# Altium PCB beta0303initial.PcbDoc (part 1 of 2)
Units mm, origin at the board's own origin, x right, y up, seen from the top; angles counter-clockwise.
Board outline 100 x 100 mm, 2 copper layers (Top Layer, Bottom Layer); 188 components, 107 nets, 516 pads, 164 vias.
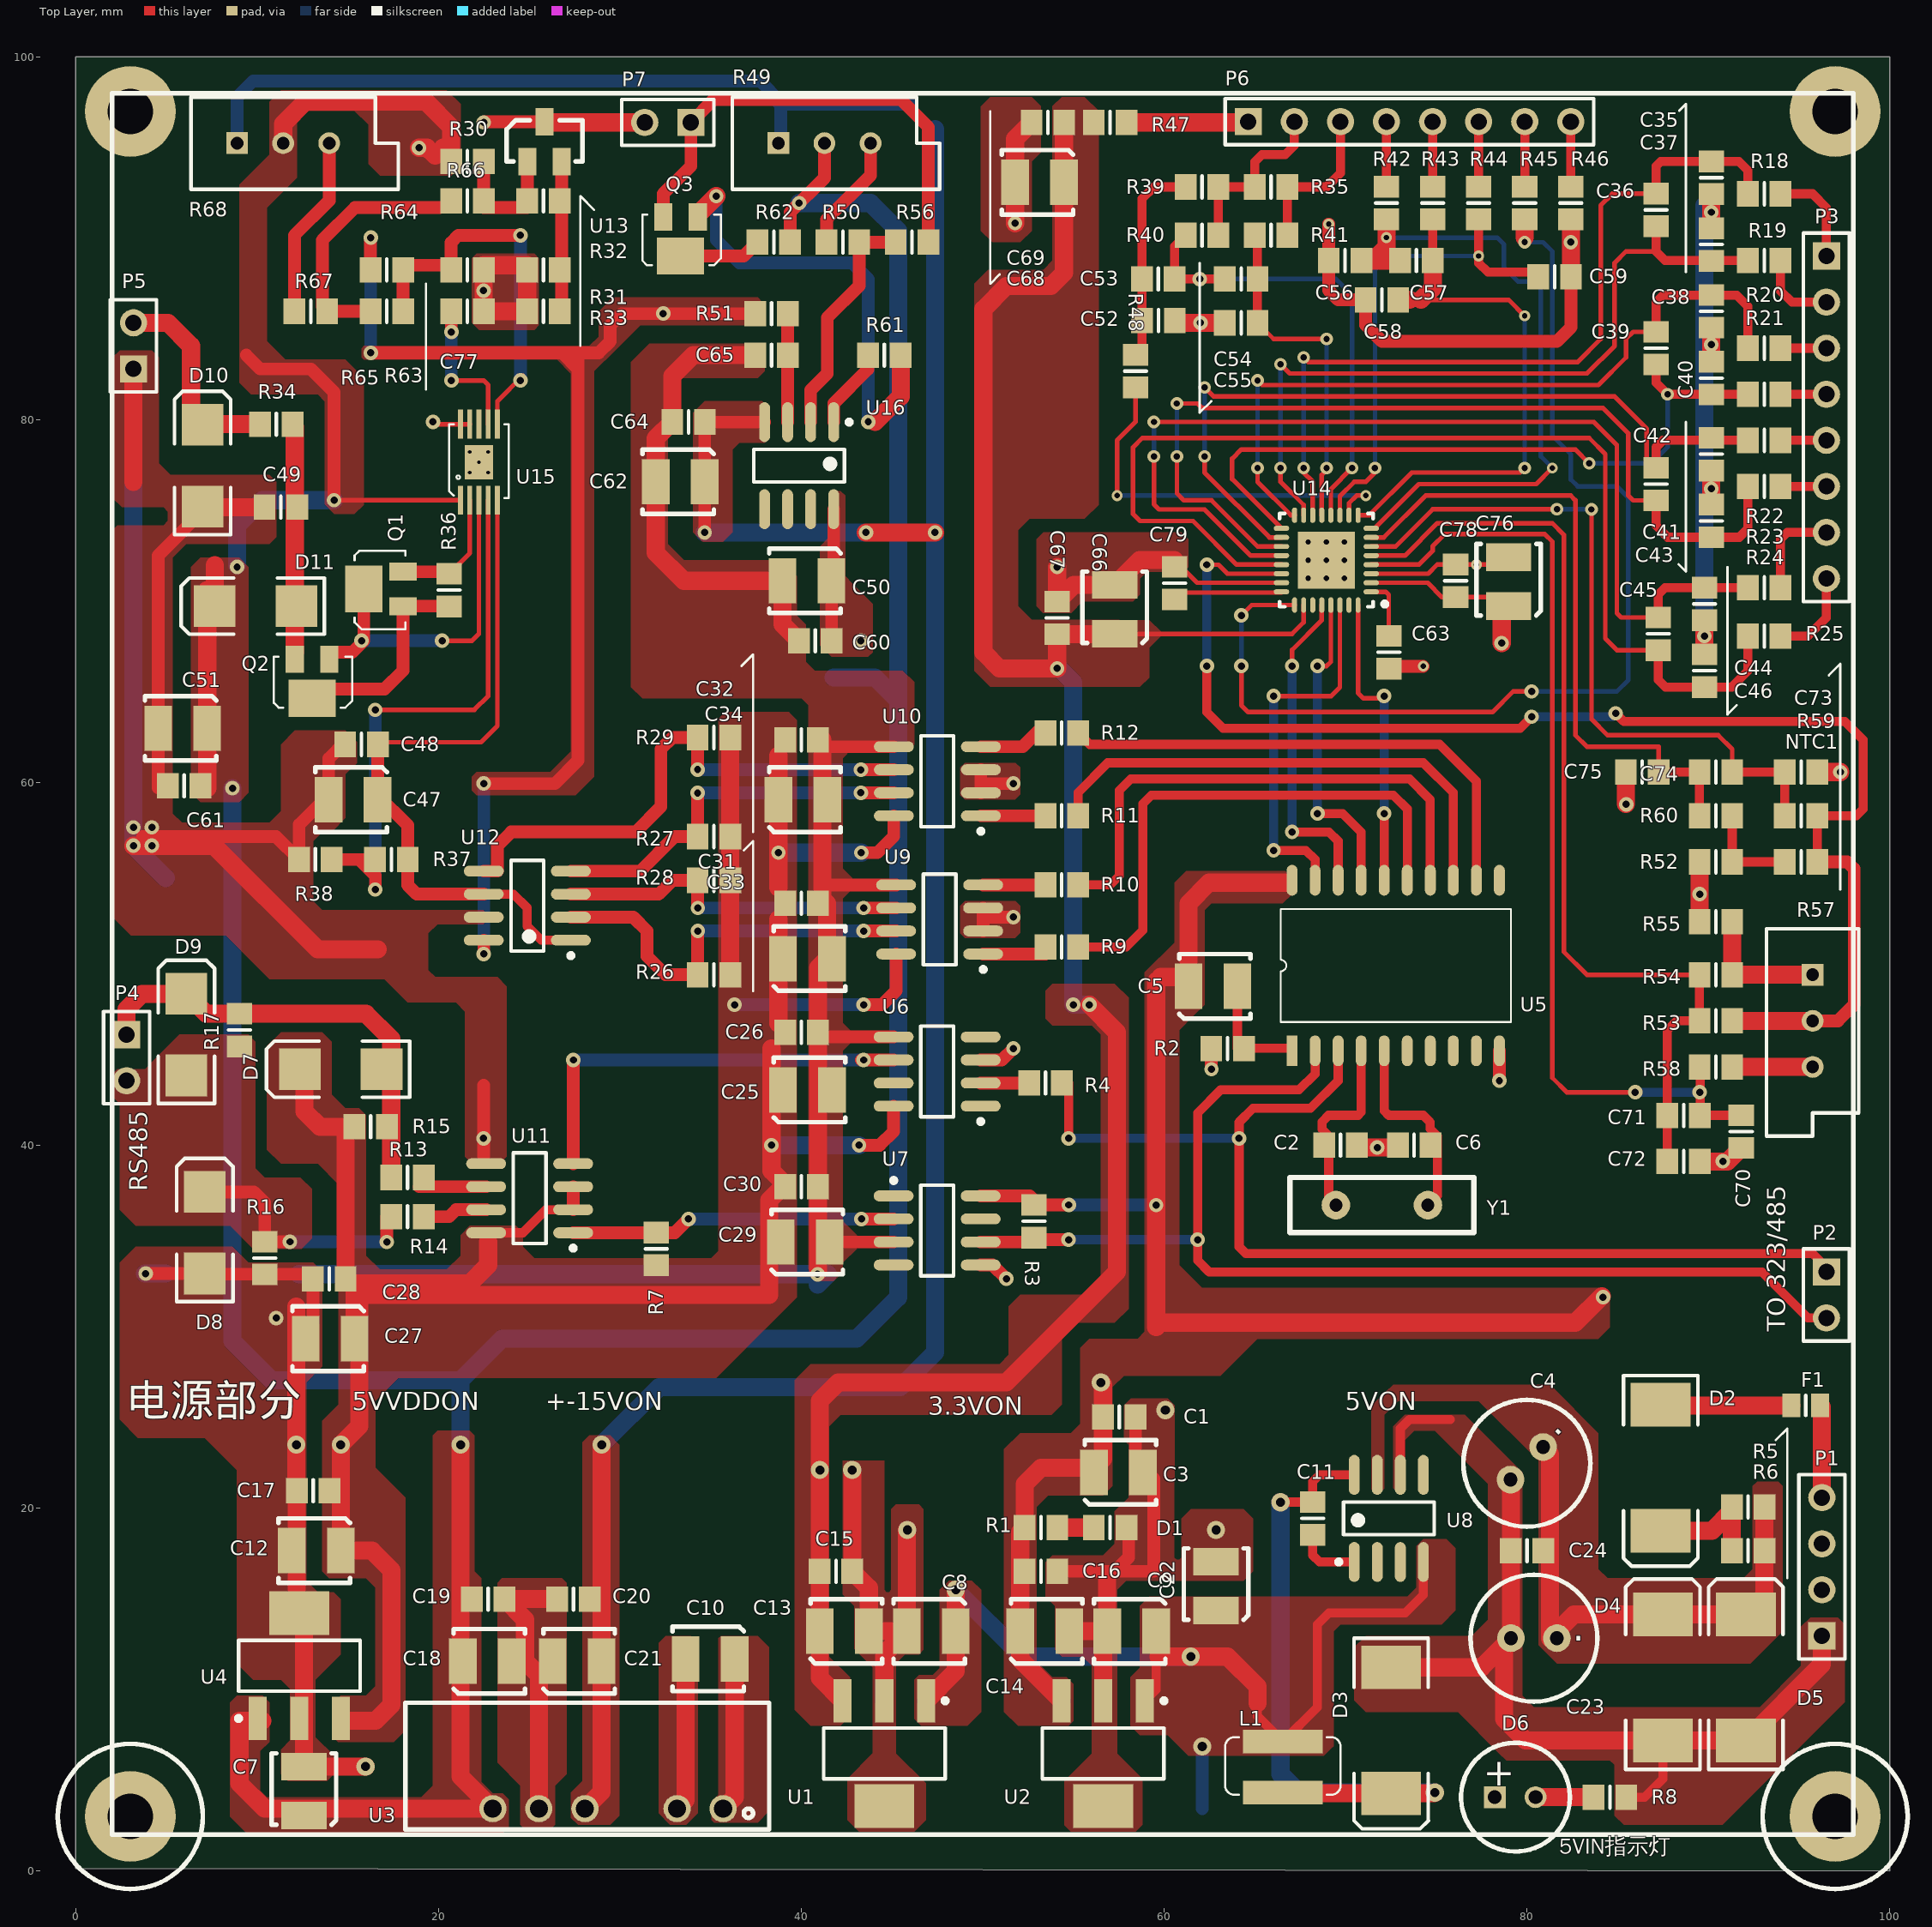
[diagram p0: Top Layer view]
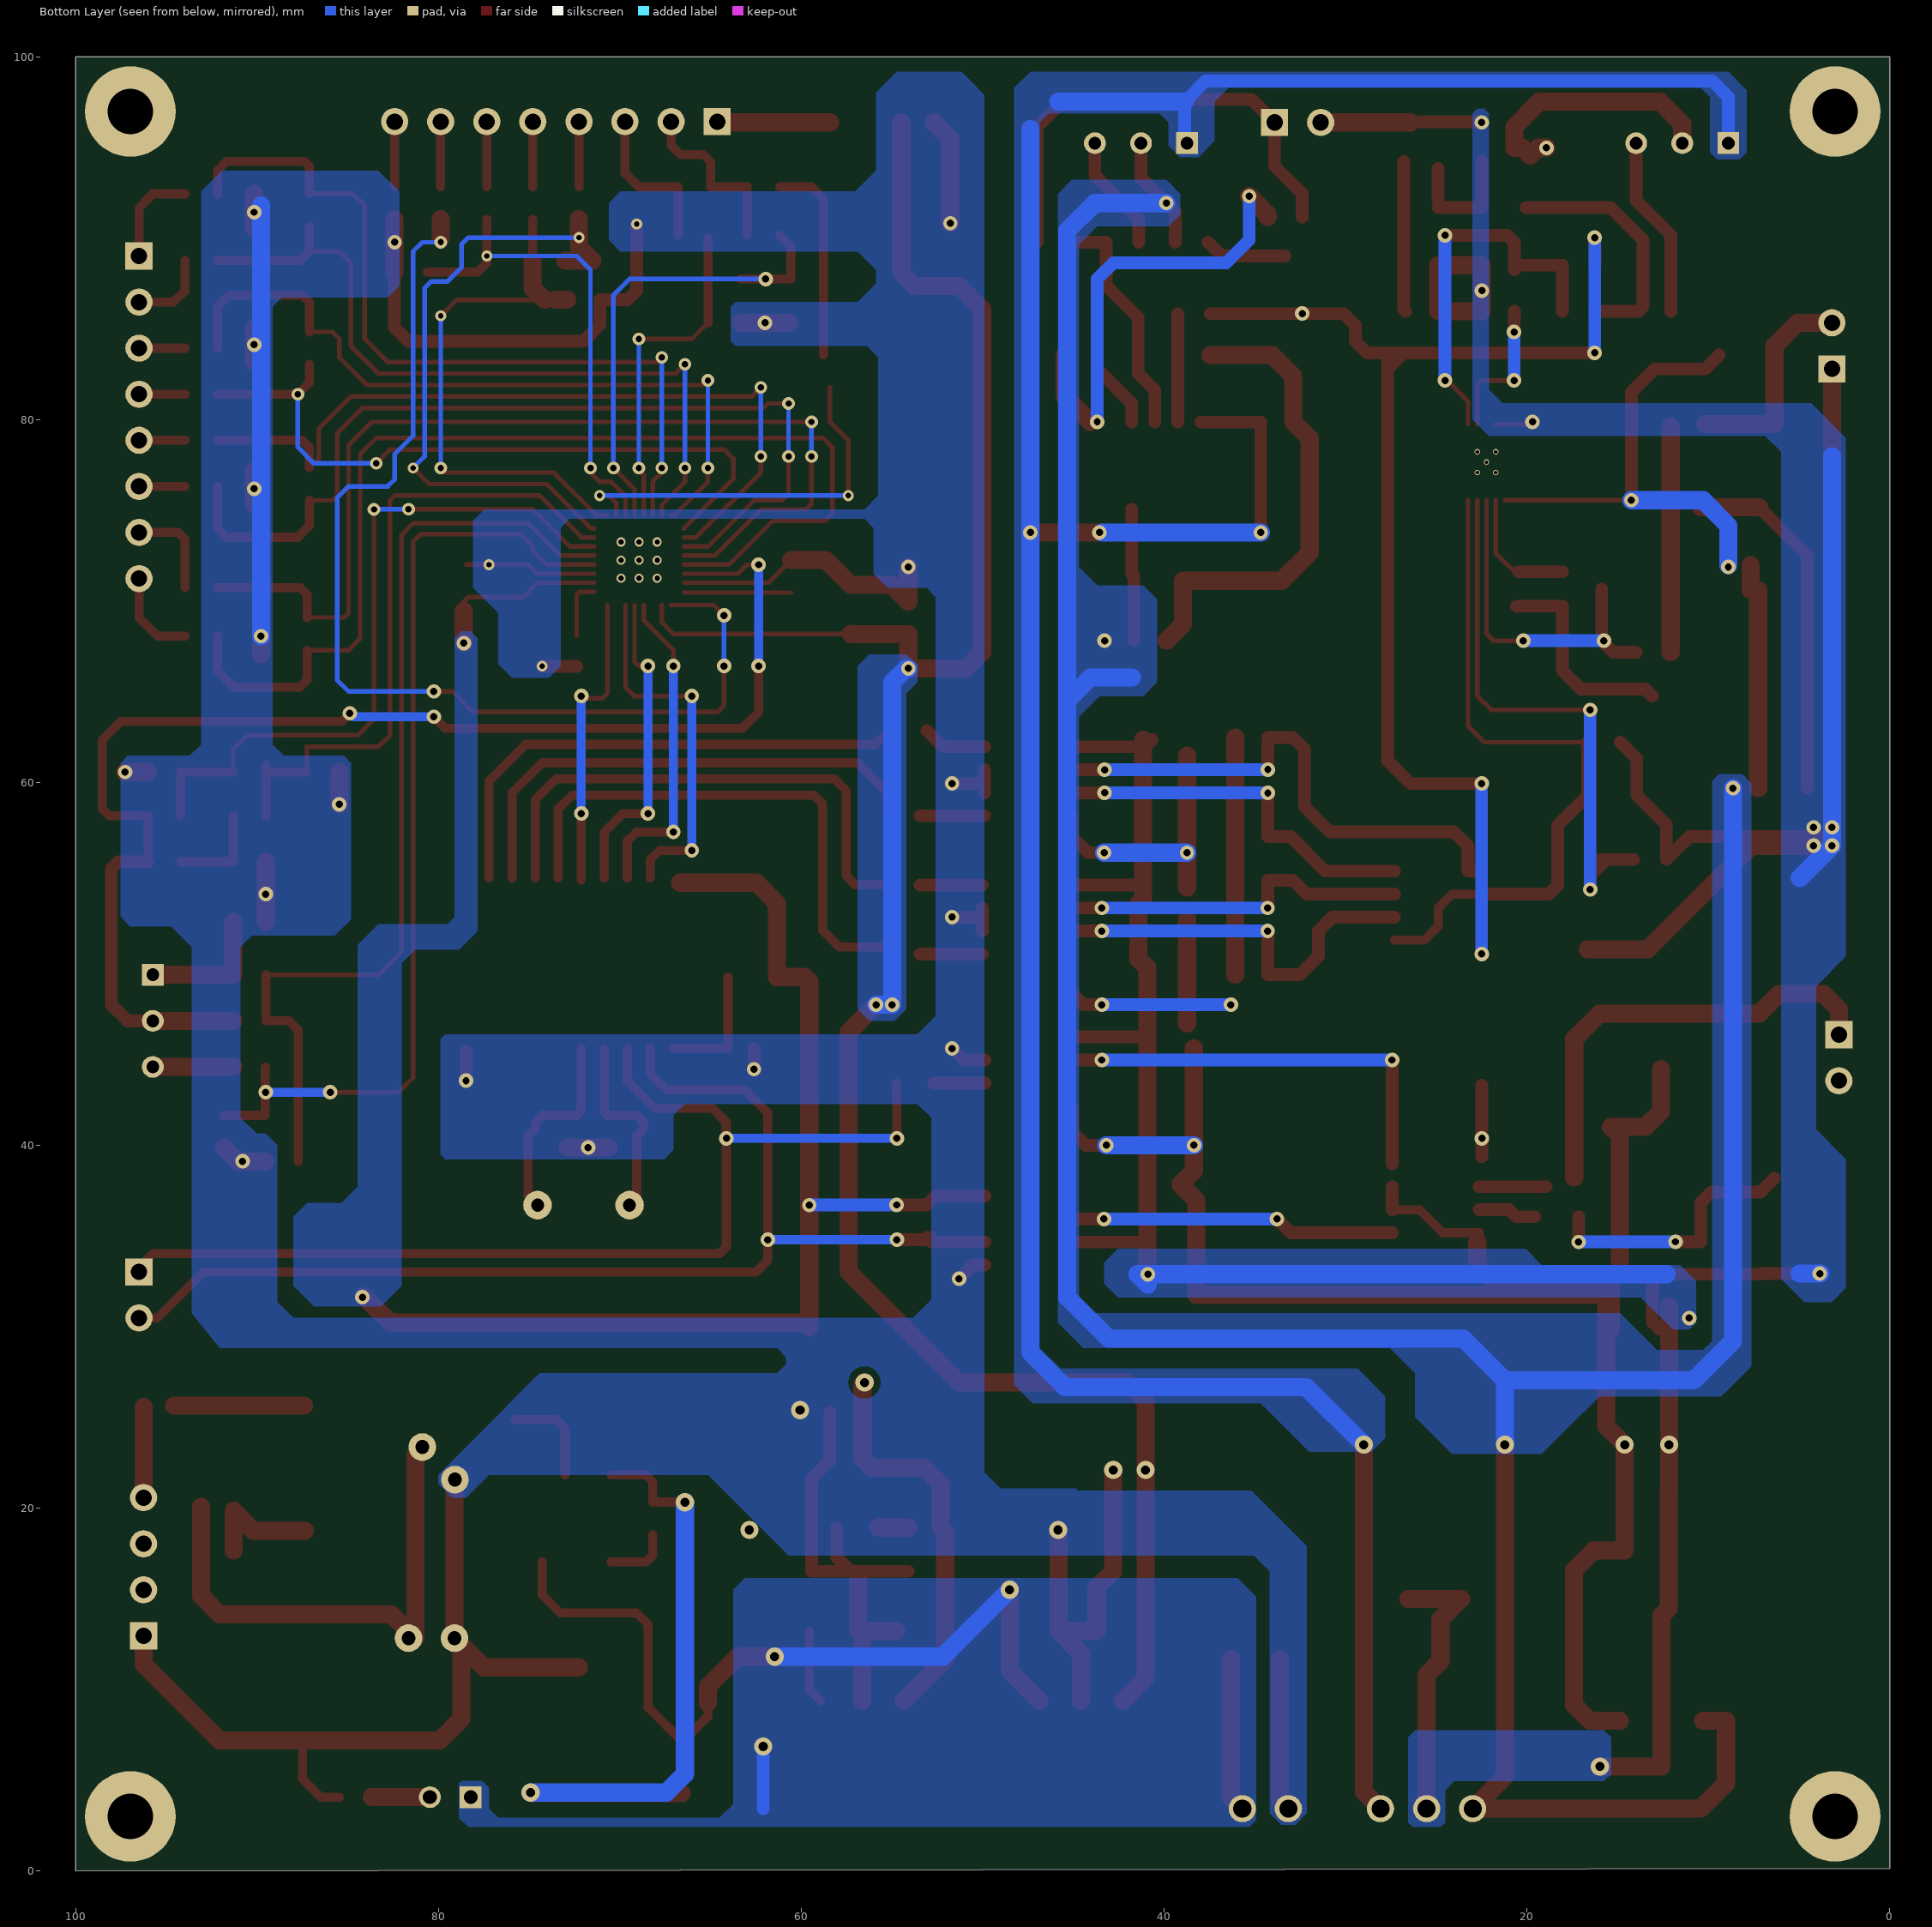
[diagram p1: Bottom Layer view, seen from below]

## Layer stack, top to bottom
Top Layer: signal copper 0.0356
Dielectric: dielectric 0.32, FR-4, Dk 4.8
Bottom Layer: signal copper 0.0356

## Board outline
0,0.127 0,100 100,100 100,0

## Design rules (kind name [scope] priority, off if disabled: settings)
Clearance AGND [InNet('AGND')] p1: gap=0.381
Clearance Clearance_1 [All] p2: gap=0.254
PlaneConnect [All] p1: planeconnectstyle=Direct reliefexpansion=0.508 reliefentries=4 reliefconductorwidth=0.254 reliefairgap=0.254
PolygonConnect [All] p1: connectstyle=Direct reliefconductorwidth=0.254 reliefentries=4 polygonreliefangle="90 Angle"
RoutingVias [All] p1: holewidth=0.711 width=1.27 viastyle="Through Hole" minholewidth=0.711 minwidth=1.27 maxholewidth=0.711 maxwidth=1.27
SilkscreenOverComponentPads SilkToSolderMaskClearance [IsPad] p1: minsilkscreentomaskgap=0.254
SolderMaskExpansion [All] p1: expansion=0.102
Width [All] p1: maxlimit=4 minlimit=0.254 preferedwidth=0.5
26 further rules are at their usual default settings.

## Components (designator, comment, footprint, x,y, rotation, side; value= is the part's Value field where it differs from the comment)
C1 "CC0805MRX7R9BB104" 6-0805_N 57.531,25.019 r0 top
C2 "CC0805MRX7R9BB330" 6-0805_N 69.723,40.005 r0 top
C3 "T494B106M010AHAUTO" CB 56.134,21.971 r90 top
C4 "ECR1VNP100M1V050011" Φ6.3×11.5 80.899,23.368 r225 top
C5 "T494B106M010AHAUTO" CB 61.341,48.768 r90 top
C6 "CC0805MRX7R9BB330" 6-0805_N 73.787,40.005 r180 top
C7 "T494B476K025ATAUTO" CB 12.573,3.048 r180 top
C8 "T494B106M010AHAUTO" CB 48.514,13.208 r270 top
C9 "T494B106M010AHAUTO" CB 59.563,13.208 r270 top
C10 "T494B106M010AHAUTO" CB 36.322,11.684 r270 top
C11 "CC0805MRX7R9BB104" 6-0805_N 68.199,19.431 r90 top
C12 "T494B476M010AHAUTO" CB 14.605,17.653 r270 top
C13 "T494B476M010AHAUTO" CB 41.021,13.208 r90 top
C14 "T494B476M010AHAUTO" CB 52.07,13.208 r90 top
C15 "CC0805MRX7R9BB104" 6-0805_N 41.91,16.51 r0 top
C16 "CC0805MRX7R9BB104" 6-0805_N 53.213,16.51 r0 top
C17 "CC0805MRX7R9BB104" 6-0805_N 13.081,20.955 r0 top
C18 "T494B476K025ATAUTO" CB 21.336,11.557 r90 top
C19 "CC0805MRX7R9BB104" 6-0805_N 22.733,14.986 r0 top
C20 "CC0805MRX7R9BB104" 6-0805_N 27.432,14.986 r180 top
C21 "T494B476K025ATAUTO" CB 26.289,11.557 r90 top
C22 "T494B476M010AHAUTO" CB 62.865,14.351 r180 top
C23 "ECR1VNP100M1V050011" Φ6.3×11.5 81.661,12.827 r180 top
C24 "CC0805MRX7R9BB104" 6-0805_N 80.01,17.653 r180 top
C25 "T494B106M010AHAUTO" CB 38.989,43.053 r90 top
C26 "CC0805MRX7R9BB104" 6-0805_N 40.005,46.228 r0 top
C27 "T494B106M010AHAUTO" CB 15.367,29.337 r270 top
C28 "CC0805MRX7R9BB104" 6-0805_N 13.97,32.639 r180 top
C29 "T494B106M010AHAUTO" CB 38.862,34.671 r90 top
C30 "CC0805MRX7R9BB104" 6-0805_N 40.005,37.719 r0 top
C31 "CC0805MRX7R9BB104" 6-0805_N 40.005,53.34 r0 top
C32 "CC0805MRX7R9BB104" 6-0805_N 40.005,62.357 r0 top
C33 "T494B106M010AHAUTO" CB 38.989,50.292 r90 top
C34 "T494B106M010AHAUTO" CB 38.735,59.055 r90 top
C35 "CC0805MRX7R9BB103" 6-0805_N 90.17,93.345 r270 top
C36 "CC0805MRX7R9BB104" 6-0805_N 87.122,91.567 r270 top
C37 "CC0805MRX7R9BB103" 6-0805_N 90.17,89.662 r90 top
C38 "CC0805MRX7R9BB103" 6-0805_N 90.17,85.979 r270 top
C39 "CC0805MRX7R9BB104" 6-0805_N 87.122,83.947 r270 top
C40 "CC0805MRX7R9BB103" 6-0805_N 90.17,82.296 r90 top
C41 "CC0805MRX7R9BB103" 6-0805_N 90.17,78.105 r270 top
C42 "CC0805MRX7R9BB104" 6-0805_N 87.122,76.454 r270 top
C43 "CC0805MRX7R9BB103" 6-0805_N 90.17,74.422 r90 top
C44 "CC0805MRX7R9BB103" 6-0805_N 89.789,69.85 r270 top
C45 "CC0805MRX7R9BB104" 6-0805_N 87.249,68.199 r270 top
C46 "CC0805MRX7R9BB103" 6-0805_N 89.789,66.167 r90 top
C47 "T494B106M010AHAUTO" CB 16.637,59.055 r270 top
C48 "CC0805MRX7R9BB104" 6-0805_N 15.748,62.103 r0 top
C49 "CC0805MRX7R9BB103" 6-0805_N 11.303,75.184 r180 top
C50 "T494B106M025AHAUTO" CB 41.656,71.12 r270 top
C51 "T494B106M025AHAUTO" CB 7.239,62.992 r270 top
C52 "CC0805MRX7R9BB103" 6-0805_N 59.69,85.471 r0 top
C53 "CC0805MRX7R9BB104" 6-0805_N 59.679,87.757 r180 top
C54 "CC0805MRX7R9BB104" 6-0805_N 64.251,87.757 r0 top
C55 "CC0805MRX7R9BB103" 6-0805_N 64.251,85.344 r180 top
C56 "CC0805MRX7R9BB103" 6-0805_N 69.977,88.773 r180 top
C57 "CC0805MRX7R9BB104" 6-0805_N 73.914,88.773 r0 top
C58 "CC0805MRX7R9BB103" 6-0805_N 72.009,86.614 r180 top
C59 "CC0805MRX7R9BB103" 6-0805_N 81.534,87.884 r0 top
C60 "CC0805MRX7R9BB104" 6-0805_N 40.767,67.818 r0 top
C61 "CC0805MRX7R9BB104" 6-0805_N 5.969,59.817 r0 top
C62 "T494B106M025AHAUTO" CB 34.671,76.581 r270 top
C63 "CC0805MRX7R9BB104" 6-0805_N 72.39,67.183 r90 top
C64 "CC0805MRX7R9BB104" 6-0805_N 33.782,79.883 r0 top
C65 "CC0805MRX7R9BB104" 6-0805_N 38.354,83.566 r180 top
C66 "T494B106M010AHAUTO" CB 57.277,68.199 r180 top
C67 "CC0805MRX7R9BB104" 6-0805_N 54.102,69.077 r90 top
C68 "T494B106M010AHAUTO" CB 54.483,93.091 r270 top
C69 "CC0805MRX7R9BB104" 6-0805_N 53.594,96.393 r180 top
C70 "CC0805MRX7R9BB103" 6-0805_N 91.821,40.756 r270 top
C71 "CC0805MRX7R9BB104" 6-0805_N 88.646,41.645 r180 top
C72 "CC0805MRX7R9BB103" 6-0805_N 88.646,39.105 r0 top
C73 "CC0805MRX7R9BB103" 6-0805_N 95.123,60.579 r0 top
C74 "CC0805MRX7R9BB104" 6-0805_N 90.424,60.579 r180 top
C75 "CC0805MRX7R9BB103" 6-0805_N 86.36,60.579 r180 top
C76 "T494B106M010AHAUTO" CB 78.994,69.723 r180 top
C77 "CC0805MRX7R9BB104" 6-0805_N 21.59,88.265 r180 top
C78 "CC0805MRX7R9BB104" 6-0805_N 76.073,71.12 r90 top
C79 "CC0805MRX7R9BB104" 6-0805_N 60.579,70.993 r270 top
D1 "150080GS75000" 6-0805_N 57.023,18.923 r0 top
D2 "1N5819" SMC 87.376,22.225 r270 top
D3 "SK32" SMC 72.517,7.747 r270 top
D4 "1N5819" SMC 87.503,10.668 r90 top
D5 "1N5819" SMC 92.075,10.668 r90 top
D6 "150080GS75000" LEDΦ3.0 78.232,4.064 r0 top
D7 "SMAJ40CA" SMB 14.605,44.196 r180 top
D8 "SMAJ40CA" SMB 7.112,35.179 r90 top
D9 "SMAJ40CA" SMB 6.096,46.101 r90 top
D10 "SMAJ40CA" SMB 6.985,77.47 r90 top
D11 "SS13" SMB 9.906,69.723 r180 top
F1 "Fuse 1" 6-0805_L 95.377,25.654 r180 top
L1 "VLS4012HBX-220M" VLS4012 66.548,4.318 r180 top
NTC1 "NTCS0805E3103JHT" 6-0805_N 95.123,55.626 r0 top
P1 "Header 4" HDR1X4 96.266,12.954 r90 top
P2 "Header 2" HDR1X2 96.52,33.02 r270 top
P3 "Header 8" HDR1X8 96.52,89.027 r270 top
P4 "Header 2" HDR1X2 2.794,46.101 r270 top
P5 "Header 2" HDR1X2 3.175,82.804 r90 top
P6 "Header 8" HDR1X8 64.643,96.437 r0 top
P7 "Header 2" HDR1X2 33.909,96.393 r180 top
Q1 "SS8550" SOT-23-BJT 18.034,69.723 r90 top
Q2 "SI2309" SOT-236-MOS 13.97,66.802 r180 top
Q3 "NPN" SOT-23-BJT 34.29,91.186 r180 top
R1 "RC0805JR-07120RL" 6-0805_N 53.213,18.923 r0 top
R2 "RC0805JR-0710KL" 6-0805_N 63.5,45.339 r0 top
R3 "RC0805JR-0710KRL" 6-0805_N 52.832,35.814 r90 top
R4 "RC0805JR-07470RL" 6-0805_N 53.467,43.434 r180 top
R5 "PNP-200KJBJ26-10R" 6-0805_N 92.202,20.066 r180 top
R6 "PNP-200KJBJ26-10R" 6-0805_N 92.202,17.653 r180 top
R7 "RC0805JR-07470RL" 6-0805_N 32.004,34.29 r270 top
R8 "RC0805JR-07470RL" 6-0805_N 84.582,4.064 r180 top
R9 "RC0805JR-07470RL" 6-0805_N 54.356,50.927 r0 top
R10 "RC0805JR-07470RL" 6-0805_N 54.356,54.356 r0 top
R11 "RC0805JR-07470RL" 6-0805_N 54.356,58.166 r0 top
R12 "RC0805JR-07470RL" 6-0805_N 54.356,62.738 r0 top
R13 "RC0805JR-0720RL" 6-0805_N 18.288,38.227 r180 top
R14 "RC0805JR-0720RL" 6-0805_N 18.288,36.068 r0 top
R15 "RC0805JR-0710KL" 6-0805_N 16.256,41.021 r0 top
R16 "RC0805JR-0710KL" 6-0805_N 10.414,33.782 r90 top
R17 "RC0805JR-07120RL" 6-0805_N 9.017,46.355 r90 top
R18 "RC0805JR-071KL" 6-0805_N 93.091,92.456 r0 top
R19 "RC0805JR-071KL" 6-0805_N 93.091,88.773 r0 top
R20 "RC0805JR-071KL" 6-0805_N 93.091,83.947 r0 top
R21 "RC0805JR-071KL" 6-0805_N 93.091,81.407 r0 top
R22 "RC0805JR-071KL" 6-0805_N 93.091,78.867 r0 top
R23 "RC0805JR-071KL" 6-0805_N 93.091,76.327 r0 top
R24 "RC0805JR-071KL" 6-0805_N 93.091,70.739 r0 top
R25 "RC0805JR-071KL" 6-0805_N 93.091,68.072 r0 top
R26 "RC0805JR-071KL" 6-0805_N 35.179,49.403 r180 top
R27 "RC0805JR-071KL" 6-0805_N 35.179,57.023 r180 top
R28 "RC0805JR-071KL" 6-0805_N 35.179,54.61 r180 top
R29 "RC0805JR-071KL" 6-0805_N 35.179,62.484 r180 top
R30 "RC0805JR-073KL" 6-0805_N 21.59,94.234 r0 top
R31 "RC0805JR-0710KL" 6-0805_N 25.781,88.265 r180 top
R32 "RC0805JR-073KL" 6-0805_N 25.781,92.075 r0 top
R33 "RC0805JR-0710KL" 6-0805_N 25.781,85.979 r180 top
R34 "RC0805JR-0715RL" 6-0805_N 11.049,79.756 r0 top
R35 "RC0805JR-075600RL" 6-0805_N 65.902,92.837 r180 top
R36 "RC0805JR-0715RL" 6-0805_N 20.574,70.612 r90 top
R37 "RC0805JR-075600RL" 6-0805_N 17.399,55.753 r180 top
R38 "RC0805JR-078200RL" 6-0805_N 13.208,55.753 r180 top
R39 "RC0805JR-071KL" 6-0805_N 62.092,92.837 r0 top
R40 "RC0805JR-071KL" 6-0805_N 62.092,90.17 r0 top
R41 "RC0805JR-071KL" 6-0805_N 65.902,90.17 r0 top
R42 "RC0805JR-071KL" 6-0805_N 72.263,91.948 r90 top
R43 "RC0805JR-071KL" 6-0805_N 74.803,91.948 r90 top
R44 "RC0805JR-071KL" 6-0805_N 77.343,91.948 r90 top
R45 "RC0805JR-07470RL" 6-0805_N 79.883,91.948 r90 top
R46 "RC0805JR-07470RL" 6-0805_N 82.423,91.948 r90 top
R47 "RC0805JR-07470RL" 6-0805_N 57.023,96.393 r0 top
R48 "Res2" 6-0805_N 58.42,82.677 r90 top
R49 "3296W-1-104" VR5 41.275,95.25 r0 top
R50 "RC0805JR-07100ML" 6-0805_N 42.291,89.789 r180 top
R51 "RC0805JR-072KL" 6-0805_N 38.354,85.852 r180 top
R52 "RC0805JR-075600RL" 6-0805_N 90.424,55.626 r0 top
R53 "RC0805JR-071000KL" 6-0805_N 90.424,46.863 r180 top
R54 "RC0805JR-0768KL" 6-0805_N 90.424,49.403 r0 top
R55 "RC0805JR-0768KL" 6-0805_N 90.424,52.324 r0 top
R56 "RC0805JR-072KL" 6-0805_N 46.101,89.789 r180 top
R57 "3296W-1-102" VR5 95.758,46.863 r270 top
R58 "RC0805JR-071KL" 6-0805_N 90.424,44.323 r0 top
R59 "RC0805JR-071KL" 6-0805_N 95.123,58.166 r0 top
R60 "RC0805JR-071KL" 6-0805_N 90.424,58.166 r0 top
R61 "RC0805JR-0710KL" 6-0805_N 44.577,83.566 r180 top
R62 "RC0805JR-07470RL" 6-0805_N 38.481,89.789 r180 top
R63 "RC0805JR-072KL" 6-0805_N 21.59,85.979 r180 top
R64 "RC0805JR-072KL" 6-0805_N 17.145,88.265 r0 top
R65 "RC0805JR-073300RL" 6-0805_N 17.145,85.979 r0 top
R66 "RC0805JR-074700RL" 6-0805_N 21.59,92.075 r180 top
R67 "RC0805JR-07100ML" 6-0805_N 12.954,85.979 r180 top
R68 "3296W-1-104" VR5 11.43,95.25 r0 top
U1 "LM1117IMP-3.3/NOPB" SOT223_N 44.577,6.477 r270 top
U2 "LM1117IMP-3.3/NOPB" SOT223_N 56.642,6.477 r270 top
U3 "A05_S-1WR3" A05_S-1WR3 35.687,3.429 r180 top
U4 "LM1117IMP-5.0/NOPB" SOT223_N 12.319,11.303 r90 top
U5 "STC12C5620AD" SOP20 67.056,45.212 r90 top
U6 "6N137" SO8_N 47.487,44.069 r180 top
U7 "6N137" SO8_N 47.487,35.306 r0 top
U8 "LM2675" TI-D8_N 72.39,19.431 r90 top
U9 "VO2630" SO8_N 47.625,52.451 r180 top
U10 "VO2630" SO8_N 47.498,60.071 r180 top
U11 "SNx5LBC184" SO8_N 25.019,37.084 r180 top
U12 "DAC7611U" TI-D8_N 24.892,53.213 r180 top
U13 "TL431" SOT-23-3 24.892,94.234 r0 top
U14 "AD7124-8" TI-RHB32-3150X3150TP_V 68.945,72.263 r180 top
U15 "XTR111" S-PDSO-G10 21.209,75.565 r90 top
U16 "TL062ACD" TI-D8_N 39.878,77.47 r270 top
Y1 "11.0592M" XTAL1 69.469,36.703 r0 top (schematic designator G1)

## Footprints (in the part's own frame and the unit in brackets; to place one, negate y for a bottom-side part, rotate by r counter-clockwise, add the part's x,y. Pads: shape width x height; smd on the part's side, far side on the other; paste and mask are expansions set on the pad)
6-0805_L [mm] "Chip Resistor, Body 2.0x1.2mm, IPC High Density"
  rect 1x1.3 smd: 1(-0.8,0) 2(0.8,0)
  silkscreen extent 0,-0.55 0,0.55, body extent -1.07,-0.7 1.07,0.7, height 0.7
6-0805_N [mm] "Chip Resistor, Body 2.0x1.2mm, IPC Medium Density"
  rect 1.2x1.4 smd: 1(-0.9,0) 2(0.9,0)
  silkscreen extent 0,-0.6 0,0.6, body extent -1.07,-0.7 1.07,0.7, height 0.7
A05_S-1WR3 [mm]
  round 1.5 hole 1: 1(0,0) 2(2.54,0) 4(7.62,0) 5(10.16,0) 6(12.7,0)
  silkscreen extent -2.54,-5.84 17.53,1.14
CB [mm] "Tantalum?Capacitor"
  rect 2.5x1.524 smd: 1(0,0) 2(0,-2.7)
  silkscreen extent -1.78,-3.43 1.78,0.51
HDR1X2 [mm] "Connector; Header; 2 Position"
  rect 1.5x1.5 hole 0.9: 1(0,0)
  round 1.5 hole 0.9: 2(2.54,0)
  silkscreen extent -1.27,-1.27 3.81,1.27
HDR1X4 [mm] "Connector; Header; 4 Position"
  rect 1.5x1.5 hole 0.9: 1(0,0)
  round 1.5 hole 0.9: 2(2.54,0) 3(5.08,0) 4(7.62,0)
  silkscreen extent -1.27,-1.27 8.89,1.27
HDR1X8 [mm] "Connector; Header; 8 Position"
  rect 1.5x1.5 hole 0.9: 1(0,0)
  round 1.5 hole 0.9: 2(2.54,0) 3(5.08,0) 4(7.62,0) 5(10.16,0) 6(12.7,0) 7(15.24,0) 8(17.78,0)
  silkscreen extent -1.27,-1.27 19.05,1.27
LEDΦ3.0 [mm]
  rect 1.2x1.2 hole 0.762: 1(0,0)
  round 1.2 hole 0.762: 2(2.25,0)
  silkscreen extent -1.85,-3 4.14,3
S-PDSO-G10 [mm]
  rect 1.6x0.27 smd: 1(0,0) 2(0,-0.508) 3(0,-1.016) 4(0,-1.524) 5(0,-2.032) 6(4.2,-2.032) 7(4.191,-1.524) 8(4.191,-1.016) 9(4.191,-0.508) 10(4.191,0)
  rect 1.88x1.57 smd: 12(2.1,-1.016)
  silkscreen extent 0.13,-2.67 4.19,0.64
SMB [mm] "DO-214-AA/SMB; 2 C-Bend Leads; Body 5.3 x 3.6 mm, inc. leads (LxW)"
  rect 2.3x2.3 smd: 1(-2.25,0) 2(2.25,0)
  silkscreen extent -3.8,-1.55 4.1,1.55
SMC [mm] "DO-214-AB/SMC; 2 C-Bend Leads; Body 7.9 x 5.9 mm, inc. leads (LxW)"
  rect 2.4x3.3 smd: 1(-3.475,0) 2(3.475,0)
  silkscreen extent -5.07,-2.05 5.43,2.05
SO8_N [mm] "SOIC, 8-Leads, Body 4.9x3.9mm, Pitch 1.27mm, IPC Medium Density"
  oval 2.2x0.6 smd: 1(-2.4,1.905) 2(-2.4,0.635) 3(-2.4,-0.635) 4(-2.4,-1.905) 5(2.4,-1.905) 6(2.4,-0.635) 7(2.4,0.635) 8(2.4,1.905)
  silkscreen extent -2.53,-2.5 0.9,2.88, body extent -2,-2.5 2,2.5, height 1.75
SOP20 [mm]
  rect 1.7x0.6 smd: 1(0,0)
  oval 1.7x0.6 smd: 2(0,-1.27) 3(0,-2.54) 4(0,-3.81) 5(0,-5.08) 6(0,-6.35) 7(0,-7.62) 8(0,-8.89) 9(0,-10.16) 10(0,-11.43) 11(9.4,-11.43) 12(9.4,-10.16) 13(9.4,-8.89) 14(9.4,-7.62) 15(9.4,-6.35) 16(9.4,-5.08) 17(9.4,-3.81) 18(9.4,-2.54) 19(9.4,-1.27) 20(9.4,0)
  silkscreen extent 1.58,-12.06 7.82,0.64
SOT223_N [mm] "SOT223, 4-Leads, Body 6.5x3.5mm, Pitch 2.3mm, Lead Span 7mm, IPC Medium Density"
  rect 2.4x1 smd: 1(-2.9,2.3) 2(-2.9,0) 3(-2.9,-2.3)
  rect 2.4x3.3 smd: 4(2.9,0)
  silkscreen extent -3.02,-3.35 1.4,3.48, body extent -1.85,-3.35 1.85,3.35, height 1.7
SOT-23-3 [mm]
  rect 1x1.524 smd: 1(0,0) 2(1.9,0) 3(0.95,2.2)
  silkscreen extent -1.14,0 3.05,2.29
SOT-23-BJT [mm]
  rect 2.6x2.05 smd: 1(0.95,2.159)
  rect 1x1.5 smd: 2(0,0) 3(1.9,0)
  silkscreen extent -1.27,-0.13 3.05,2.67
SOT-236-MOS [mm]
  rect 1x1.5 smd: 1(0,0) 3(1.9,0)
  rect 2.6x2.05 smd: 2(0.95,2.159)
  silkscreen extent -1.27,-0.13 3.05,2.67
TI-D8_N [mm] "SOIC, 8-Leads, Body 4.9x3.9mm, Pitch 1.27mm, IPC Medium Density"
  oval 2.2x0.6 smd: 1(-2.4,1.905) 2(-2.4,0.635) 3(-2.4,-0.635) 4(-2.4,-1.905) 5(2.4,-1.905) 6(2.4,-0.635) 7(2.4,0.635) 8(2.4,1.905)
  silkscreen extent -2.52,-2.5 0.9,2.88, body extent -2,-2.5 2,2.5, height 1.75
TI-RHB32-3150X3150TP_V [mm] "QFN, 32-Leads, Body 5x5mm, Pitch 0.5mm, Thermal Pad 3.15x3.15mm"
  oval 0.85x0.28 smd: 1(-2.475,1.75) 2(-2.475,1.25) 3(-2.475,0.75) 4(-2.475,0.25) 5(-2.475,-0.25) 6(-2.475,-0.75) 7(-2.475,-1.25) 8(-2.475,-1.75) 17(2.475,-1.75) 18(2.475,-1.25) 19(2.475,-0.75) 20(2.475,-0.25) 21(2.475,0.25) 22(2.475,0.75) 23(2.475,1.25) 24(2.475,1.75)
  oval 0.28x0.85 smd: 9(-1.75,-2.475) 10(-1.25,-2.475) 11(-0.75,-2.475) 12(-0.25,-2.475) 13(0.25,-2.475) 14(0.75,-2.475) 15(1.25,-2.475) 16(1.75,-2.475) 25(1.75,2.475) 26(1.25,2.475) 27(0.75,2.475) 28(0.25,2.475) 29(-0.25,2.475) 30(-0.75,2.475) 31(-1.25,2.475) 32(-1.75,2.475)
  rect 3.15x3.15 smd: 33(0,0)
  silkscreen extent -3.35,-2.58 2.58,2.57, body extent -2.5,-2.5 2.5,2.5, height 1
VLS4012 [mm]
  rect 4.4x1.3 smd: 1(0,0) 2(0,-2.8)
  silkscreen extent -3.17,-3.05 3.18,0.13
VR5 [mm] "Thru-Hole; 3 Leads"
  rect 1.2x1.2 hole 0.7: 1(-2.54,0)
  round 1.2 hole 0.7: 2(0,0) 3(2.54,0)
  silkscreen extent -5.08,-2.54 6.35,2.54
XTAL1 [mil]
  round 62 hole 28: 1(0,0) 2(200,0)
  silkscreen extent -100,-60 300,60
Φ6.3×11.5 [mil]
  round 60 hole 30: 1(0,0) 2(100,0)
  silkscreen extent -88,-138 188,138

## Part data
C1 C2 C6 C11 C15 C16 C17 C19 C20 C24 C26 C28 C30 C31 C32 C35 C36 C37 C38 C39 C40 C41 C42 C43 C44 C45 C46 C48 C49 C52 C53 C54 C55 C56 C57 C58 C59 C60 C61 C63 C64 C65 C67 C69 C70 C71 C72 C73 C74 C75 C77 C78 C79: library part Cap, "Capacitor"
C3 C5 C7 C8 C9 C10 C12 C13 C14 C18 C21 C22 C25 C27 C29 C33 C34 C47 C50 C51 C62 C66 C68 C76: library part "Cap Pol1", "Polarized Capacitor (Radial)"
C4 C23: library part "Cap Pol1", "Polarized Capacitor"
D1 D6: library part LED2, "Typical RED, GREEN, YELLOW, AMBER GaAs LED"
D2 D3 D4 D5: library part Diode, "Default Diode"
D7 D8 D9 D10: library part "D Zener", "Zener Diode"
D11: library part "D Schottky", "Schottky Diode"
F1: "Fuse"
L1: library part Inductor
NTC1: library part "Res Varistor", "Varistor (Voltage-Sensitive Resistor)"
P1: "Header, 4-Pin"
P2 P4 P5 P7: "Header, 2-Pin"
P3 P6: "Header, 8-Pin"
Q1: library part PNP, "PNP Bipolar Transistor"
Q2: library part NMOS-2, "N-Channel Power MOSFET"
Q3: "NPN Bipolar Transistor"
R1 R2 R3 R4 R5 R6 R7 R8 R9 R10 R11 R12 R13 R14 R15 R16 R17 R18 R19 R20 R21 R22 R23 R24 R25 R26 R27 R28 R29 R30 R31 R32 R33 R34 R35 R36 R37 R38 R39 R40 R41 R42 R43 R44 R45 R46 R47 R50 R51 R52 R53 R54 R55 R56 R58 R59 R60 R61 R62 R63 R64 R65 R66 R67: library part Res2, "Resistor"
R48: "Resistor"
R49 R57 R68: library part RPot, "Potentiometer"
U1 U2 U4: library part LM1117IMP
U12: library part DAC7611
U16: "Low-Power JFET-Input Operational Amplifier, 7 to 36 V, 0 to 70 degC, 8-pin SOIC (D8), Green (RoHS & no Sb/Br)"
Y1: library part CRYSTAL, "2.66.70.0102"

## Free pads (board coordinates)
  round 5 hole 2.5: 0(3,3) 1(97,3) 2(97,97) 3(3,97)

## Via types
v1: diameter 0.8, hole 0.4, Top Layer to Bottom Layer, 103 vias
v2: diameter 0.7, hole 0.35, Top Layer to Bottom Layer, 22 vias
v3: diameter 1, hole 0.5, Top Layer to Bottom Layer, 16 vias
v4: diameter 0.6, hole 0.3, Top Layer to Bottom Layer, 9 vias
v5: diameter 0.5, hole 0.3, Top Layer to Bottom Layer, 9 vias
v6: diameter 0.3, hole 0.2, Top Layer to Bottom Layer, 5 vias

## Nets (pads, with @x,y where several pads share a name; then routed paths per layer and width w, separated by ;. In a path a pad name is that pad's centre, name@x,y a point inside that pad or via, vN(x,y) a via of type N, cw(c..) or ccw(c..) an arc to the next point about the centre after c; other vN are vias at no path point)
3.3AVDD: C13.1 C15.1 C66.1 C67.1 C68.1 C69.1 R47.1 U1.3 U14.26 | length 125.2
  Top Layer w0.254: C66.1@57.277,68.199 67.056,68.199 67.695,68.838 U14.26@67.695,69.788
  Top Layer w1: U1.3@42.277,9.377 41.021,10.633 C13.1@41.021,13.208 v3(41.021,22.098) 41.021,25.908 42.037,26.924 51.308,26.924 57.404,33.02 57.404,46.228 v1(55.88,47.752) ; C69.1@54.494,96.393 54.483,96.382 C68.1@54.483,93.091 54.483,88.105 53.754,87.376 51.308,87.376 50.038,86.106 50.038,67.183 50.927,66.294 v1(54.102,66.294) C67.1@54.102,68.177 57.255,68.177 C66.1@57.277,68.199
  Bottom Layer w1: v1(54.102,66.294) 54.229,66.294 54.991,65.532 v1(54.991,47.752) v1(55.88,47.752)
3.3VCC: C1.1 C3.1 C5.1 C14.1 C16.1 C76.1 C78.1 R1.1 R3.2 U2.3 U5.20 U7.8 U14.2 | length 96.7
  Top Layer w0.254: U14.2@71.42,71.013 74.529,71.013 75.322,70.22 75.946,70.22 78.359,70.22 C76.1@78.867,69.712
  Top Layer w0.7: U7.8@49.887,37.211 52.589,37.211 53.086,36.714 v1(54.748,36.714)
  Top Layer w1: R1.1@52.07,18.68 C14.1@52.07,13.208 52.07,11.649 U2.3@54.342,9.377 ; R1.1@52.313,18.923 52.313,21.325 53.213,22.225 56.134,22.225 56.631,22.722 v3@56.631,26.808 ; 59.563,29.972 v1(59.563,36.703) 59.563,49.022 59.817,49.276 61.341,49.276 61.341,53.34 62.484,54.483 66.675,54.483 ; 60.071,30.226 82.677,30.226 v1@84.138,31.686 ; v1(78.613,67.691) C76.1@78.613,69.458
  Bottom Layer w0.7: v1(54.748,36.714) 59.552,36.714 v1(59.563,36.703)
  other v1: 84.201,31.623
  other v3: 56.515,26.924
5VDD: C12.1 C17.2 C25.1 C26.1 C27.1 C28.1 C29.1 C30.1 C31.1 C32.1 C33.1 C34.1 D7.2 R7.2 R15.1 R26.1 R27.1 R28.1 R29.1 U4.3 U6.8 U9.8 U10.8 U11.2 U11.3 U11.8 | length 150.5
  Top Layer w0.5: U11.8@22.619,35.179 24.638,35.179 25.908,36.449 U11.2@27.419,36.449
  Top Layer w0.7: U11.2@27.419,36.449 U11.3@27.419,37.719 ; v1(43.18,40.005) 44.323,40.005 45.087,40.769 U6.8@45.087,42.164 ; v1(43.307,56.134) 44.196,56.134 45.098,57.036 U10.8@45.098,58.166 ; v1(43.434,47.752) 44.45,47.752 45.225,48.527 U9.8@45.225,50.546
  Top Layer w1: D7.2@12.609,44.196 12.609,41.874 13.462,41.021 R15.1@15.356,41.021 14.87,40.535 C28.1@14.87,32.893 ; U4.3@14.873,8.276 16.531,8.276 17.399,9.144 17.399,16.576 16.322,17.653 C12.1@14.605,17.653 v3(14.605,23.495) 15.621,24.511 15.621,31.877 ; C27.1@15.367,29.845 15.367,32.396 21.728,32.396 22.733,33.401 22.733,34.671 ; 15.748,31.75 38.227,31.75 38.227,34.682 38.227,36.968 38.978,37.719 39.105,37.846 38.354,38.597 v1(38.354,40.005) 38.354,45.35 ; R26.1@36.079,49.403 R29.1@36.079,62.484 ; C26.1@38.735,46.725 38.735,50.292 38.735,52.462 ; 38.735,54.218 v1(38.735,56.134) C34.1@38.735,59.055 38.735,61.479
  Bottom Layer w0.7: v1(36.322,47.752) v1(43.434,47.752)
  Bottom Layer w1: v1(38.354,40.005) v1(43.18,40.005) ; v1(38.735,56.134) v1(43.307,56.134)
5VIN: C8.1 C9.1 C10.1 C22.1 D6.1 L1.2 U1.1 U2.1 U3.1 U8.4 | length 62.7
  Top Layer w0.5: U2.1@58.942,9.377 59.563,9.998 C9.1@59.563,13.208 ; 65.151,9.244 65.151,8.515 L1.2@66.548,7.118 68.453,9.023 68.453,13.589 69.088,14.224 73.3,14.224 74.295,15.219 U8.4@74.295,17.031
  Top Layer w1: U3.1@35.687,3.429 36.322,4.064 C10.1@36.322,11.684 ; U1.1@46.877,9.377 48.514,11.014 C8.1@48.514,13.208 v3(48.514,15.494) ; 59.69,11.811 v3(61.468,11.811) 63.5,11.811 65.151,10.16 65.151,9.244
  Bottom Layer w0.7: 62.103,3.429 v3(62.103,6.858)
  Bottom Layer w1: v3(48.514,15.494) 52.197,11.811 v3(61.468,11.811)
15V: C7.1 C18.1 C19.1 C50.1 C51.1 C60.2 C61.2 D11.2 R30.1 R49.2 R62.1 R68.2 U3.6 U4.1 U15.1 U16.8 | length 250.2
  Top Layer w0.254: v1(14.235,75.565) U15.1@21.209,75.565
  Top Layer w0.7: 9.398,83.566 10.16,82.804 12.954,82.804 14.235,81.523 v1(14.235,75.565) ; R62.1@39.381,89.789 39.381,91.44 41.275,93.334 R49.2@41.275,95.25 ; C60.2@41.667,67.818 41.667,71.374 41.783,71.49 U16.8@41.783,75.07
  Top Layer w1: C61.2@7.25,59.69 7.25,70.612 7.656,70.612 7.656,71.977 ; U4.1@10.273,8.276 9.017,8.276 9.017,4.826 10.414,3.429 U3.6@22.987,3.429 21.209,5.207 v3(21.209,23.495) ; R68.2@11.43,95.25 11.43,96.31 12.656,97.536 19.304,97.536 20.69,96.15 20.69,94.996 20.248,94.996 19.806,94.554 19.365,94.996 v1(18.923,94.996)
  Bottom Layer w1: v1(8.636,59.69) 8.636,29.21 10.795,27.051 21.209,27.051 ; v1@8.89,71.977 8.89,74.168 10.287,75.565 v1(14.235,75.565) ; v3(21.209,23.495) 21.209,27.051 ; v1(39.878,91.948) 43.815,91.948 45.339,90.424 45.339,64.516 ; 41.783,65.786 44.069,65.786 45.339,64.516 ; 21.209,27.051 23.495,29.337 43.053,29.337 45.339,31.623 45.339,64.516
  other v1: 43.285,67.818 8.89,71.882
-15V: C20.1 C21.2 C62.1 C64.2 R49.1 R68.1 U3.4 U16.4 | length 172.9
  Top Layer w0.7: v1@34.671,73.914 C62.1@34.671,76.581 34.671,79.872 37.971,79.872 U16.4@37.973,79.87
  Top Layer w1: U3.4@28.067,3.429 28.989,4.351 C21.2@28.989,11.557 v3(28.989,23.495) ; v1(43.561,73.787) v1(47.371,73.787)
  Bottom Layer w0.7: R68.1@8.89,95.25 8.89,97.79 9.779,98.679 37.719,98.679 38.862,97.536 38.862,95.377 R49.1@38.735,95.25
  Bottom Layer w1: v3(28.989,23.495) 32.164,26.67 45.466,26.67 47.371,28.575 v1(47.371,73.787) 47.371,96.012 ; v1(34.671,73.787) v1@43.434,73.787 ; 38.862,97.536 45.847,97.536
A1: R9.2 U5.15 | length 29.8
  Top Layer w0.5: R9.2@55.256,50.927 57.912,50.927 58.834,51.849 58.834,58.834 59.309,59.309 72.644,59.309 73.406,58.547 U5.15@73.406,54.739
A2: R10.2 U5.14 | length 29.4
  Top Layer w0.5: R10.2@55.256,54.356 57.023,54.356 57.531,54.864 57.531,59.563 58.166,60.198 73.533,60.198 74.676,59.055 U5.14@74.676,54.739
A3: R11.2 U5.13 | length 28
  Top Layer w0.5: R11.2@55.256,58.166 55.256,59.447 56.896,61.087 74.295,61.087 75.946,59.436 U5.13@75.946,54.739
A4: R12.2 U5.12 | length 28.4
  Top Layer w0.5: R12.2@55.256,62.738 55.891,62.103 75.184,62.103 77.216,60.071 U5.12@77.216,54.739
AGND: C1.2 C2.2 C3.2 C4.2 C6.2 C8.2 C9.2 C10.2 C13.2 C14.2 C15.2 C16.2 C22.2 C23.2 C24.2 C35.2 C37.2 C38.2 C40.2 C41.2 C43.2 C44.2 C46.2 C52.2 C55.2 C56.2 C58.2 C59.2 C63.1 C66.2 C67.2 C68.2 C69.2 C70.2 C72.2 C73.2 C75.2 C76.2 C78.2 C79.1 D1.2 D3.1 D4.1 D5.1 P1.1 R2.1 R8.1 R46.1 R52.1 R55.1 U1.2 U1.4 U2.2 U2.4 U3.2 U5.10 U6.3 U7.5 U8.6 U9.2 U9.3 U10.2 U10.3 U14.3 U14.23 | length 220.6
  Top Layer w0.254: C79.1@60.568,72.274 61.829,71.013 U14.23@66.47,71.013 ; U14.3@71.42,71.513 74.561,71.513 75.068,72.02 C76.2@78.475,72.02
  Top Layer w0.5: U8.6@73.025,21.831 73.025,24.384 73.533,24.892 75.783,24.892 ; R8.1@85.482,4.064 86.487,4.064 87.503,5.08 D4.1@87.503,7.193
  Top Layer w0.7: U7.5@49.887,33.401 50.546,33.401 v1(51.308,32.639) ; U6.3@49.887,44.704 51.054,44.704 v1(51.689,45.339) ; U10.2@49.898,59.436 49.898,59.944 ; U10.3@49.898,60.706 49.898,59.944 ; U9.2@50.025,51.816 50.025,52.578 ; U9.3@50.025,53.086 50.025,52.578 ; v1@51.562,59.944 49.898,59.944 ; v1(51.689,52.578) 50.025,52.578 ; C16.2@54.113,16.51 57.277,16.51 ; D1.2@58.05,18.923 58.05,17.283 57.277,16.51 ; C1.2@58.431,25.273 58.431,22.628 59.436,21.623 59.436,16.51 57.277,16.51 ; v1@62.6,44.207 R2.1@62.6,45.339 ; v4(69.077,90.794) C56.2@69.077,88.773 69.077,87.133 69.596,86.614 C58.2@71.109,86.614 71.109,85.228 72.009,84.328 81.661,84.328 82.434,85.101 C59.2@82.434,87.884 ; C63.1@72.39,66.41 v4@74.284,66.41 ; v1(78.486,43.561) U5.10@78.486,45.212
  Top Layer w1: U3.2@33.147,3.429 33.622,3.904 C10.2@33.622,11.684 ; v3@42.81,22.098 C15.2@42.81,16.51 43.721,15.599 C13.2@43.721,13.208 C8.2@45.814,13.208 ; U1.2@44.577,9.377 44.577,11.971 C8.2@45.814,13.208 ; v3(45.847,18.796) 45.814,18.763 C8.2@45.814,13.208 ; v1(51.783,90.838) C68.2@51.783,93.091 51.783,95.482 C69.2@52.694,96.393 ; v1(54.102,71.882) C67.2@54.102,69.977 55.024,70.899 C66.2@57.277,70.899 58.652,72.274 C79.1@60.568,72.274 ; C14.2@54.77,13.208 56.421,13.208 56.642,12.987 U2.2@56.642,9.377 ; C9.2@56.863,13.208 56.863,16.096 ; C52.2@60.662,85.344 C55.2@63.351,85.344 ; C2.2@70.623,39.878 C6.2@72.887,39.878 ; D3.1@72.263,11.222 77.516,11.222 C23.2@78.74,12.446 ; C4.2@79.121,21.554 C23.2@79.121,12.827 C23.2@78.74,12.446 ; C59.2@82.434,88.138 R46.1@82.434,91.037 ; v1@85.46,58.823 C75.2@85.46,60.579 ; D4.1@87.514,7.182 D4.1@87.503,7.193 ; R55.1@89.524,52.324 R52.1@89.524,55.626 ; C72.2@89.546,39.105 91.07,39.105 C70.2@91.821,39.856 ; C46.2@89.789,67.067 C44.2@89.789,68.95 ; C43.2@90.17,75.322 C41.2@90.17,77.205 ; C40.2@90.17,83.196 v1(90.17,84.137) C38.2@90.17,85.079 ; C37.2@90.17,90.562 C35.2@90.17,92.445 ; C73.2@96.023,60.579 v1(97.282,60.579) ; P1.1@96.266,12.954 96.266,11.384 D5.1@92.075,7.193 D4.1@87.503,7.193 ; C23.2@78.74,12.446 78.74,8.382 79.929,7.193 D4.1@87.503,7.193
  Bottom Layer w1: v1(89.789,68.072) 89.789,91.821
  other v1: 90.805,39.116 71.755,39.878 62.611,44.196 89.535,53.848 85.482,58.801 51.689,59.944 90.17,76.2 62.007,85.344 82.423,89.789 90.17,91.44
  other v3: 62.865,18.796 42.799,22.098 60.071,25.4
  other v4: 74.295,66.421 77.216,72.009
AIN0: C70.1 C71.1 R58.1 U14.4 | length 54
  Top Layer w0.254: U14.4@71.42,72.013 74.045,72.013 74.803,72.771 74.803,73.025 75.471,73.693 80.993,73.693 81.407,73.279 81.407,43.724 82.205,42.926 v1(85.979,42.926)
  Top Layer w0.5: R58.1@89.524,44.323 89.557,44.29 89.557,41.656 C70.1@91.821,41.656
  Bottom Layer w0.5: v1(85.979,42.926) v1(89.535,42.926)
AIN1: C71.2 C72.1 R53.2 R54.1 U14.5 | length 54.4
  Top Layer w0.254: U14.5@71.42,72.513 73.275,72.513 75.057,74.295 81.407,74.295 82.042,73.66 82.042,50.673 83.312,49.403 R54.1@89.524,49.403
  Top Layer w0.5: C72.1@87.746,39.105 87.746,46.344 88.265,46.863 R53.2@89.524,46.863 R54.1@89.524,49.403
AIN2: C73.1 C74.1 R59.1 U14.6 | length 39.6
  Top Layer w0.254: U14.6@71.42,73.013 72.759,73.013 74.816,75.07 v2(81.661,75.07) ; v2(83.566,75.057) 83.566,63.489 84.444,62.611 90.551,62.611 91.324,61.838 C74.1@91.324,60.579
  Top Layer w0.5: C74.1@91.324,60.579 C73.1@94.223,60.579 R59.1@94.223,58.166
  Bottom Layer w0.254: v2(81.661,75.07) v2@83.553,75.07
AIN3: C74.2 C75.1 R60.1 U14.7 | length 36.6
  Top Layer w0.254: U14.7@71.42,73.513 72.116,73.513 74.422,75.819 82.423,75.819 82.677,75.565 82.677,62.611 83.323,61.965 87.26,61.965 C75.1@87.26,60.579
  Top Layer w0.5: C75.1@87.26,60.579 C74.2@89.524,60.579 ; R60.1@89.524,58.166 C74.2@89.524,60.96
AIN4: C56.1 C57.1 R42.1 U14.8 | length 36
  Top Layer w0.254: U14.8@71.42,74.013 71.6,74.013 74.041,76.454 80.518,76.454 v4(81.407,77.343)
  Top Layer w1: R42.1@72.263,91.048 72.263,89.524 71.512,88.773 C57.1@73.014,88.773
  Bottom Layer w0.254: v4(72.263,90.043) 78.359,90.043 78.74,89.662 78.74,88.392 79.502,87.63 80.391,87.63 80.772,87.249 80.772,77.978 v4(81.407,77.343)
AIN5: C57.2 C58.1 R43.1 U14.9 | length 30.7
  Top Layer w0.254: U14.9@70.695,74.738 71.309,74.738 73.66,77.089 79.629,77.089 v2(79.883,77.343) ; 73.533,86.614 74.168,86.614 78.994,86.614 v4(79.883,85.725)
  Top Layer w0.5: R43.1@74.803,91.048 74.814,91.037 C57.2@74.814,88.773
  Top Layer w1: C58.1@72.909,86.614 73.533,86.614 ; 74.168,86.614 74.814,87.26 C57.2@74.814,88.773
  Bottom Layer w0.254: v2(79.883,77.343) v4(79.883,85.725)
AIN6: R48.1 U14.10 | length 21.9
  Top Layer w0.254: v4(57.404,75.819) 57.404,78.867 58.42,79.883 R48.1@58.42,81.777 ; U14.10@70.195,74.738 70.195,75.402 70.612,75.819 v4(71.12,75.819)
  Bottom Layer w0.254: v4(57.404,75.819) v4(71.12,75.819)
AIN7: C59.1 R44.1 U14.11 | length 26.5
  Top Layer w0.254: U14.11@69.695,74.738 69.695,75.791 70.485,76.581 71.12,76.581 71.628,77.089 v2(71.628,77.343)
  Top Layer w0.5: R44.1@77.343,91.048 77.343,88.646 77.851,88.138 C59.1@80.634,88.138
  Bottom Layer w0.254: v2(71.628,77.343) 71.628,88.265 72.39,89.027 v4@77.216,89.027
  other v4: 77.343,89.027
AIN8: C35.1 C36.1 R18.1 U14.14 | length 44.5
  Top Layer w0.254: v2@67.691,77.089 68.195,76.585 U14.14@68.195,74.738 ; v2(67.691,83.439) 67.945,83.185 82.804,83.185 84.074,84.455 84.074,91.821 84.72,92.467 C36.1@87.122,92.467
  Top Layer w0.5: C36.1@87.122,92.467 87.122,93.98 87.387,94.245 C35.1@90.17,94.245 91.683,94.245 92.191,93.737 R18.1@92.191,92.456
  Bottom Layer w0.254: v2(67.691,77.343) v2(67.691,83.439)
AIN9: C36.2 C37.1 R19.1 U14.15 | length 41.9
  Top Layer w0.254: v2(66.421,77.343) 66.421,76.581 67.695,75.307 U14.15@67.695,74.738 ; v2(66.421,83.058) 66.929,82.55 83.312,82.55 84.836,84.074 84.836,88.646 85.471,89.281 87.122,89.281
  Top Layer w0.5: C36.2@87.122,90.667 87.122,89.281 87.63,88.773 R19.1@92.191,88.773
  Bottom Layer w0.254: v2(66.421,77.343) v2(66.421,83.058)
AIN10: C38.1 C39.1 R20.1 U14.16 | length 41.7
  Top Layer w0.254: v2(65.151,77.343) 65.151,76.581 66.994,74.738 U14.16@67.195,74.738 ; v2(65.151,82.169) 65.405,81.915 83.947,81.915 85.471,83.439 85.471,84.455 85.863,84.847 C39.1@87.122,84.847
  Top Layer w0.5: C39.1@87.122,84.847 87.122,86.487 87.503,86.868 91.567,86.868 92.191,86.244 R20.1@92.191,83.947
  Bottom Layer w0.254: v2(65.151,77.343) v2(65.151,82.169)
AIN11: C39.2 C40.1 R21.1 U14.17 | length 39.1
  Top Layer w0.254: U14.17@66.47,74.013 63.754,76.729 63.754,77.851 64.262,78.359 82.677,78.359 v2(83.439,77.597)
  Top Layer w0.5: C39.2@87.122,83.047 87.122,82.042 v2(87.757,81.407) R21.1@92.191,81.407
  Bottom Layer w0.254: v2(83.439,77.597) 86.868,77.597 87.757,78.486 v2(87.757,81.407)
AIN12: C41.1 C42.1 R22.1 U14.18 | length 44.5
  Top Layer w0.254: v2(62.23,77.978) 62.23,77.089 65.806,73.513 U14.18@66.47,73.513 ; v2(62.23,81.788) 62.738,81.28 84.836,81.28 86.614,79.502 86.614,77.862 C42.1@87.122,77.354
  Top Layer w0.5: C42.1@87.122,77.354 87.122,78.486 87.503,78.867 R22.1@92.191,78.867
  Bottom Layer w0.254: v2(62.23,77.978) v2(62.23,81.788)
AIN13: C42.2 C43.1 R23.1 U14.19 | length 51.8
  Top Layer w0.254: v2(60.706,77.978) 60.706,75.946 61.087,75.565 62.611,75.565 65.163,73.013 U14.19@66.47,73.013 ; v2(60.706,80.899) 61.849,80.899 62.103,80.645 84.201,80.645 85.598,79.248 85.598,75.819 85.863,75.554 C42.2@87.122,75.554
  Top Layer w0.5: C42.2@87.122,75.554 87.122,74.168 87.768,73.522 C43.1@90.17,73.522 91.711,73.522 92.191,74.002 R23.1@92.191,76.327
  Bottom Layer w0.254: v2(60.706,77.978) v2(60.706,80.899)
AIN14: C44.1 C45.1 R24.1 U14.20 | length 56.8
  Top Layer w0.254: v2(59.436,77.978) 59.436,75.347 59.726,75.057 62.23,75.057 64.774,72.513 U14.20@66.47,72.513 ; v2(59.436,79.883) 83.693,79.883 84.963,78.613 84.963,69.342 85.206,69.099 C45.1@87.249,69.099
  Top Layer w0.5: C45.1@87.249,69.099 87.249,70.358 87.63,70.739 R24.1@92.191,70.739
  Bottom Layer w0.254: v2(59.436,77.978) v2(59.436,79.883)
AIN15: C45.2 C46.1 R25.1 U14.21 | length 62
  Top Layer w0.254: U14.21@66.47,72.013 64.004,72.013 61.595,74.422 58.674,74.422 58.293,74.803 58.293,78.486 58.801,78.994 83.439,78.994 84.328,78.105 84.328,67.945 84.974,67.299 C45.2@87.249,67.299
  Top Layer w0.5: C45.2@87.249,67.299 87.249,65.659 87.641,65.267 C46.1@89.789,65.267 91.302,65.267 92.191,66.156 R25.1@92.191,68.072
C\S\: U5.16 U14.32 | length 16.3
  Top Layer w0.254: U14.32@70.695,69.788 70.695,64.941 70.993,64.643 v1@72.263,64.643
  Top Layer w0.5: U5.16@72.136,54.612 v1(72.136,58.293)
  Bottom Layer w0.5: v1(72.136,58.293) v1@72.136,64.389
  other v1: 72.136,64.77
D1: R26.2 U9.7 U12.2 | length 22.5
  Top Layer w0.7: U12.2@27.292,52.578 30.734,52.578 31.496,51.816 31.496,50.419 32.512,49.403 R26.2@34.279,49.403 v1@34.279,51.816 ; v1(43.434,51.816) U9.7@45.225,51.816
  Bottom Layer w0.7: v1(34.29,51.816) v1(43.434,51.816)
D2: R28.2 U9.6 U12.3 | length 19.8
  Top Layer w0.7: U12.3@27.292,53.848 32.131,53.848 32.893,54.61 R28.2@34.279,54.61 v1@34.279,53.097 ; v1(43.434,53.086) U9.6@45.225,53.086
  Bottom Layer w0.7: v1(34.29,53.086) v1(43.434,53.086)
D3: R27.2 U10.7 U12.4 | length 21
  Top Layer w0.7: U12.4@27.292,55.118 31.115,55.118 33.02,57.023 R27.2@34.279,57.023 v1(34.279,59.425) ; v1(43.285,59.436) U10.7@45.098,59.436
  Bottom Layer w0.7: v1@34.279,59.436 v1(43.285,59.436)
D4: R29.2 U10.6 U12.5 | length 29.7
  Top Layer w0.7: U12.5@22.492,55.118 23.241,55.118 23.241,56.515 24.003,57.277 30.861,57.277 32.258,58.674 32.258,61.849 32.893,62.484 R29.2@34.279,62.484 ; v1(34.279,60.717) R29.2@34.279,62.103 ; v1(43.285,60.706) U10.6@45.098,60.706
  Bottom Layer w0.7: v1@34.29,60.706 v1(43.285,60.706)
DIN: U5.17 U14.29 | length 17.5
  Top Layer w0.254: v1(68.453,66.421) 68.961,66.421 69.195,66.655 U14.29@69.195,69.788
  Top Layer w0.5: v1(68.453,58.293) 69.85,58.293 70.866,57.277 U5.17@70.866,54.739
  Bottom Layer w0.5: v1(68.453,58.293) v1(68.453,66.421)
DOUT: U5.18 U14.28 | length 18
  Top Layer w0.254: v1(67.056,66.421) 67.056,67.31 68.695,68.949 U14.28@68.695,69.788
  Top Layer w0.5: v1(67.056,57.277) 69.088,57.277 69.596,56.769 U5.18@69.596,54.739
  Bottom Layer w0.5: v1(67.056,57.277) v1(67.056,66.421)
Iout: D10.2 P5.2 R34.1 | length 11.8
  Top Layer w1: P5.2@3.175,85.344 5.08,85.344 6.35,84.074 6.35,79.756 R34.1@10.16,79.756